# Altium PCB Antenna_array.PcbDoc
Units mm, origin at the board's own origin, x right, y up, seen from the top; angles counter-clockwise.
Board outline 115.53 x 58.55 mm, 2 copper layers (Top Layer, Bottom Layer), stack 0.533 mm thick; 26 components, 62 nets, 207 pads, 50 vias.
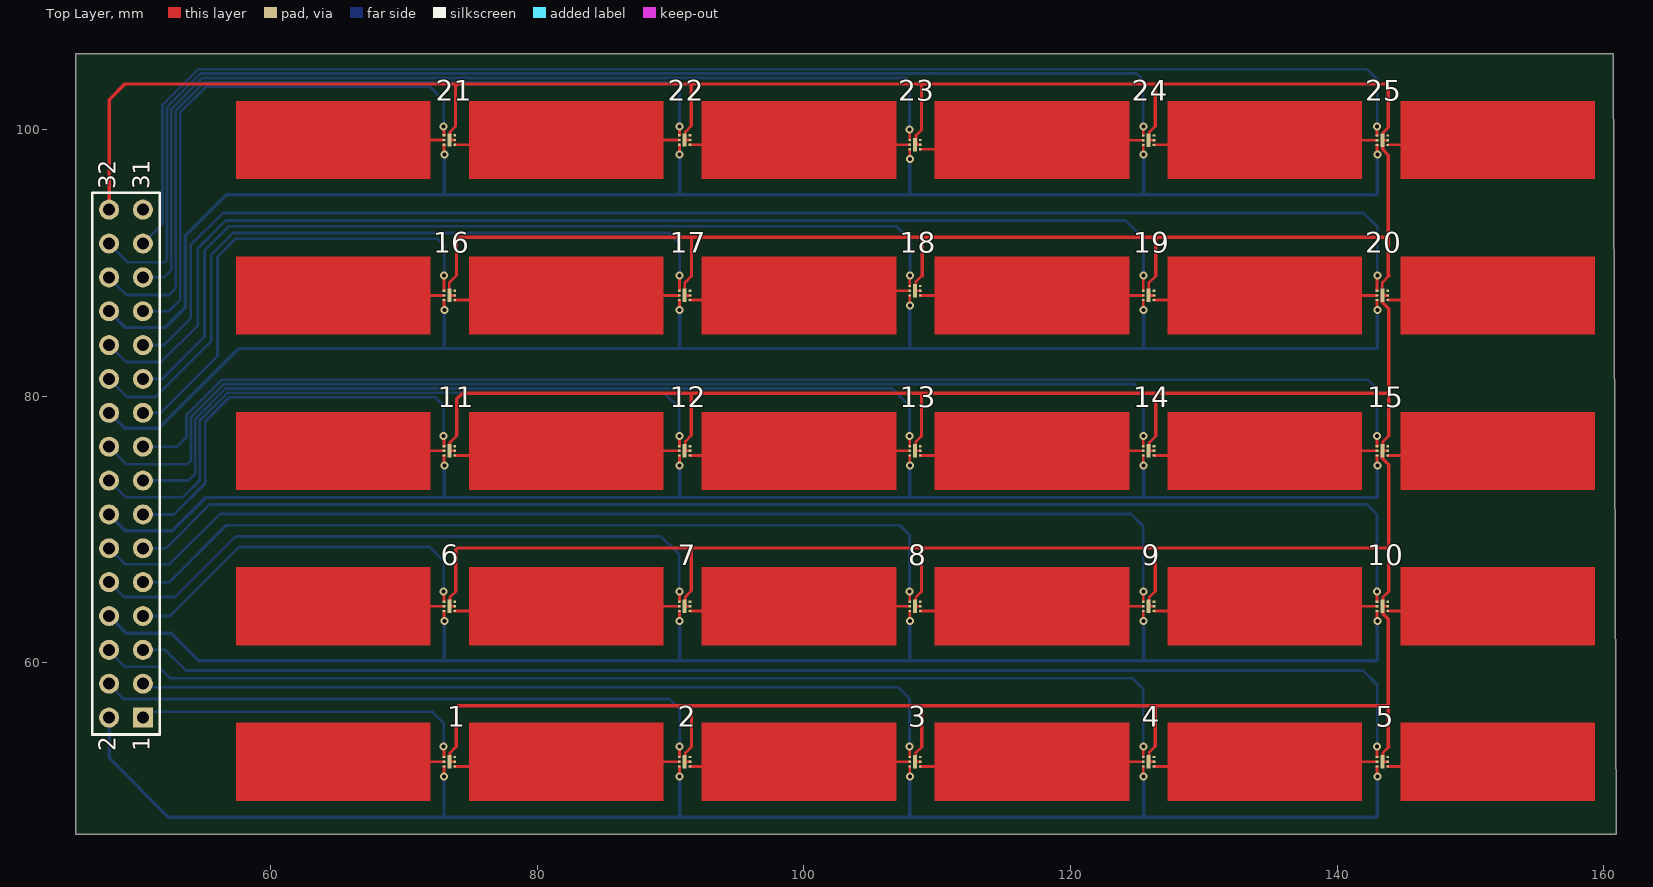
[diagram p0: Top Layer view]
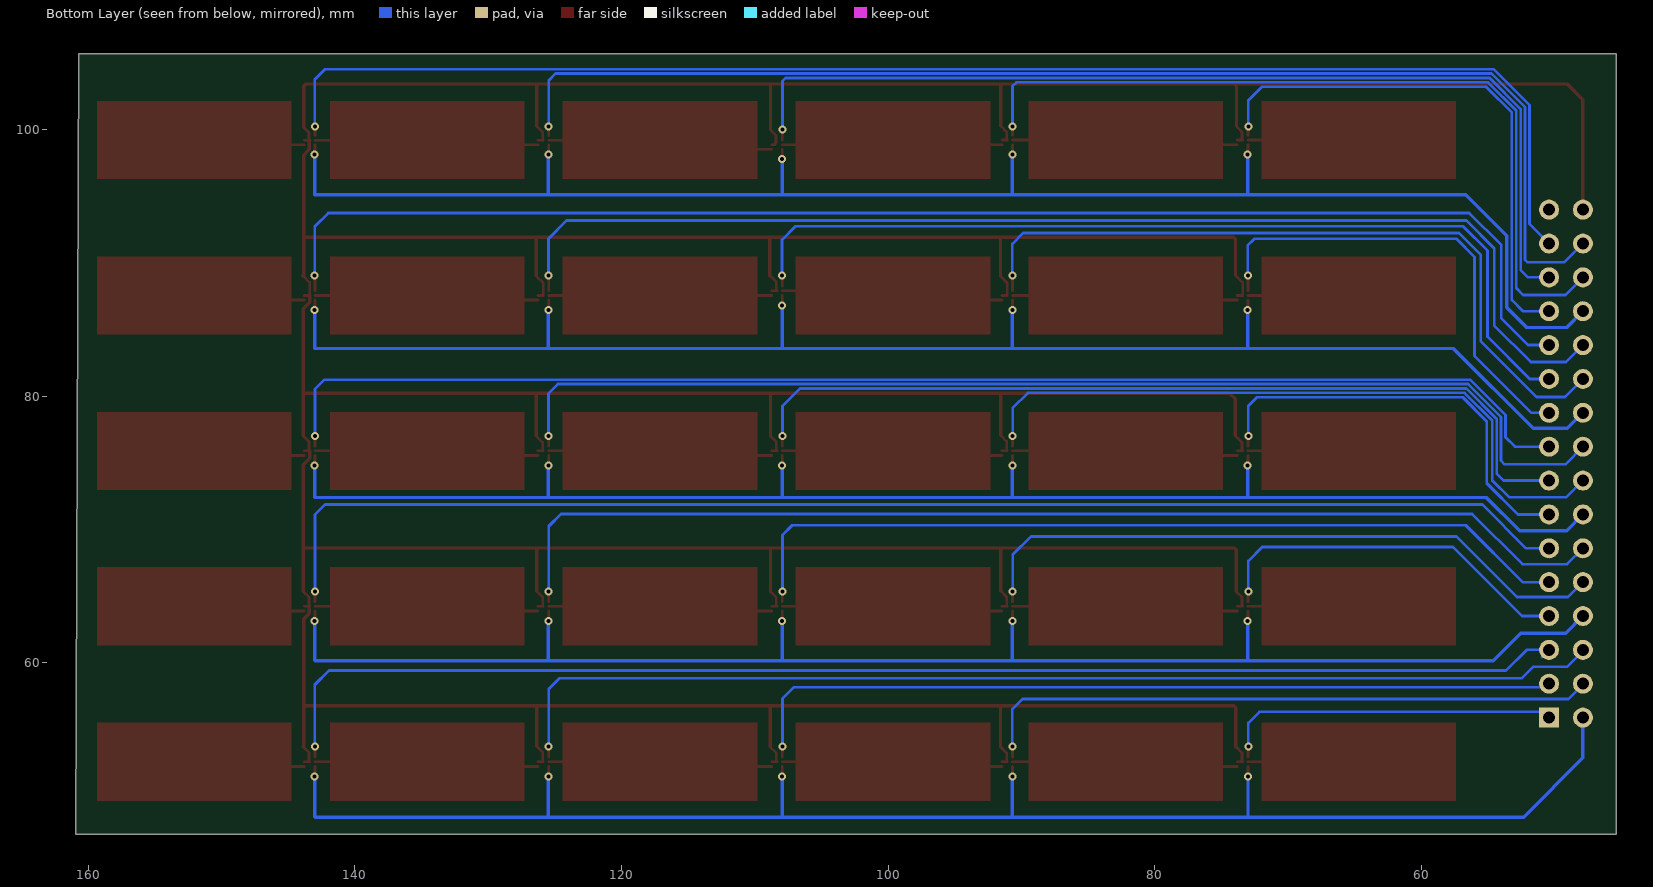
[diagram p1: Bottom Layer view, seen from below]

## Layer stack, top to bottom
Top Solder: solder mask 0.0102, Solder Resist, Dk 3.5
Top Layer: signal copper 0.0356
Dielectric 2: prepreg 0.0711, PP-006, Dk 4.1
Dielectric 1: dielectric 0.32, FR-4, Dk 4.8
Dielectric 3: prepreg 0.0711, PP-006, Dk 4.1
Bottom Layer: signal copper 0.0356
Bottom Solder: solder mask 0.0102, Solder Resist, Dk 3.5

## Board outline
45.39,47.117 160.919,47.117 160.701,105.664 45.39,105.664

## Design rules (kind name [scope] priority, off if disabled: settings)
Clearance [All] p1: gap=0.127 ignorepadtopadclearanceinfootprint=FALSE except(0: Arc-Hole Track-Hole SMDPad-Hole THPad-Hole Via-Hole Fill-Hole Poly-Hole Region-Hole Text-Hole)
PolygonConnect [All] p1: connectstyle=Relief reliefconductorwidth=0.254 reliefentries=4 polygonreliefangle="90 Angle" airgapwidth=0.254
RoutingVias [All] p1: holewidth=0.711 width=1.27 viastyle="Through Hole" minholewidth=0.711 minwidth=1.27 maxholewidth=0.711 maxwidth=1.27
SolderMaskExpansion [All] p1: expansion=0.102
Width [All] p1: maxlimit=0.508 minlimit=0.127 preferedwidth=0.203 minimp=50.000000 maximp=50.000000 favimp=50.000000
30 further rules are at their usual default settings.

## Components (designator, comment, footprint, x,y, rotation, side; value= is the part's Value field where it differs from the comment)
1 "Comment" PCBCOMPONENT_1 75.806,54.918 r180 top
2 "Comment" PCBCOMPONENT_1 93.459,54.918 r180 top
3 "Comment" PCBCOMPONENT_1 110.731,54.918 r180 top
4 "Comment" PCBCOMPONENT_1 128.257,54.918 r180 top
5 "Comment" PCBCOMPONENT_1 145.783,54.918 r180 top
6 "Comment" PCBCOMPONENT_1 75.806,66.578 r180 top
7 "Comment" PCBCOMPONENT_1 93.459,66.578 r180 top
8 "Comment" PCBCOMPONENT_1 110.731,66.578 r180 top
9 "Comment" PCBCOMPONENT_1 128.257,66.578 r180 top
10 "Comment" PCBCOMPONENT_1 145.783,66.578 r180 top
11 "Comment" PCBCOMPONENT_1 75.806,78.238 r180 top
12 "Comment" PCBCOMPONENT_1 93.459,78.238 r180 top
13 "Comment" PCBCOMPONENT_1 110.731,78.238 r180 top
14 "Comment" PCBCOMPONENT_1 128.257,78.238 r180 top
15 "Comment" PCBCOMPONENT_1 145.783,78.238 r180 top
16 "Comment" PCBCOMPONENT_1 75.806,89.898 r180 top
17 "Comment" PCBCOMPONENT_1 93.459,89.898 r180 top
18 "Comment" PCBCOMPONENT_1 110.731,90.248 r180 top
19 "Comment" PCBCOMPONENT_1 128.257,89.898 r180 top
20 "Comment" PCBCOMPONENT_1 145.783,89.898 r180 top
21 "Comment" PCBCOMPONENT_1 75.806,101.558 r180 top
22 "Comment" PCBCOMPONENT_1 93.459,101.558 r180 top
23 "Comment" PCBCOMPONENT_1 110.731,101.208 r180 top
24 "Comment" PCBCOMPONENT_1 128.257,101.537 r180 top
25 "Comment" PCBCOMPONENT_1 145.783,101.537 r180 top
? "Comment" HDR2X16 50.419,55.88 r90 top

## Footprints (in the part's own frame and the unit in brackets; to place one, negate y for a bottom-side part, rotate by r counter-clockwise, add the part's x,y. Pads: shape width x height; smd on the part's side, far side on the other; paste and mask are expansions set on the pad)
HDR2X16 [mm] "Connector; Header; 16x2 Position"
  rect 1.5x1.5 hole 0.9: 1(0,0)
  round 1.5 hole 0.9: 2(0,2.54) 3(2.54,0) 4(2.54,2.54) 5(5.08,0) 6(5.08,2.54) 7(7.62,0) 8(7.62,2.54) 9(10.16,0) 10(10.16,2.54) 11(12.7,0) 12(12.7,2.54) 13(15.24,0) 14(15.24,2.54) 15(17.78,0) 16(17.78,2.54) 17(20.32,0) 18(20.32,2.54) 19(22.86,0) 20(22.86,2.54) 21(25.4,0) 22(25.4,2.54) 23(27.94,0) 24(27.94,2.54) 25(30.48,0) 26(30.48,2.54) 27(33.02,0) 28(33.02,2.54) 29(35.56,0) 30(35.56,2.54) 31(38.1,0) 32(38.1,2.54)
  silkscreen extent -1.27,-1.27 39.37,3.81
PCBCOMPONENT_1 [mm]
  rect 0.2x0.17 smd: 1(2,2.7) 2(2,2.35) 3(2,2) 4(2.8,2) 5(2.8,2.35) 6(2.8,2.7)
  rect 0.3x1 smd: 7(2.4,2.35)
  body extent 1.79,1.75 3,2.95, height 0.25

## Via types
v1: diameter 0.6, hole 0.3, Top Layer to Bottom Layer, 50 vias

## Nets (pads, with @x,y where several pads share a name; then routed paths per layer and width w, separated by ;. In a path a pad name is that pad's centre, name@x,y a point inside that pad or via, vN(x,y) a via of type N, cw(c..) or ccw(c..) an arc to the next point about the centre after c; other vN are vias at no path point)
Ant1: 1.5 | length 1
  Top Layer w0.203: 71.981,52.568 1.5
Ant2: 1.1 2.5 | length 2.5
  Top Layer w0.203: 1.1 74.93,52.218 ; 89.281,52.568 2.5
Ant3: 2.1 3.5 | length 2.4
  Top Layer w0.203: 2.1 92.562,52.218 92.583,52.197 ; 106.68,52.578 106.69,52.568 3.5
Ant4: 3.1 4.5 | length 2.8
  Top Layer w0.203: 3.1 109.961,52.218 109.982,52.197 ; 123.952,52.568 4.5
Ant5: 4.1 5.5 | length 2.8
  Top Layer w0.203: 4.1 127.635,52.218 ; 141.605,52.578 141.615,52.568 5.5
Ant6: 5.1 | length 1.3
  Top Layer w0.203: 5.1 145.034,52.218
Ant7: 6.5 | length 1.8
  Top Layer w0.203: 71.247,64.262 71.281,64.228 6.5
Ant8: 6.1 7.5 | length 3.1
  Top Layer w0.203: 6.1 75.311,63.878 ; 89.027,64.228 7.5
Ant9: 7.1 8.5 | length 2.5
  Top Layer w0.203: 7.1 92.71,63.878 ; 106.68,64.228 8.5
Ant10: 8.1 9.5 | length 2.8
  Top Layer w0.203: 8.1 110.109,63.878 ; 124.079,64.262 124.113,64.228 9.5
Ant11: 9.1 10.5 | length 2.8
  Top Layer w0.203: 9.1 127.505,63.878 127.508,63.881 ; 141.478,64.228 10.5
Ant12: 10.1 | length 1.5
  Top Layer w0.203: 10.1 145.288,63.878
Ant13: 11.5 | length 1.7
  Top Layer w0.203: 71.374,75.819 71.443,75.888 11.5
Ant14: 11.1 12.5 | length 3
  Top Layer w0.203: 11.1 75.184,75.538 ; 89.027,75.888 12.5
Ant15: 12.1 13.5 | length 2.5
  Top Layer w0.203: 12.1 92.683,75.538 92.71,75.565 ; 106.68,75.888 13.5
Ant16: 13.1 14.5 | length 3
  Top Layer w0.203: 13.1 110.109,75.538 ; 123.825,75.888 14.5
Ant17: 14.1 15.5 | length 3
  Top Layer w0.203: 14.1 127.862,75.538 127.889,75.565 ; 141.605,75.888 15.5
Ant18: 15.1 | length 1.5
  Top Layer w0.203: 15.1 145.188,75.538 145.288,75.438
Ant19: 16.5 | length 1.8
  Top Layer w0.203: 71.247,87.63 71.329,87.548 16.5
Ant20: 16.1 17.5 | length 3.3
  Top Layer w0.203: 16.1 75.565,87.198 ; 89.154,87.548 17.5
Ant21: 17.1 18.5 | length 3
  Top Layer w0.203: 17.1 92.913,87.198 92.964,87.249 ; 106.426,87.898 18.5
Ant22: 18.1 19.5 | length 3.4
  Top Layer w0.203: 18.1 110.49,87.548 ; 123.825,87.548 19.5
Ant23: 19.1 20.5 | length 3.1
  Top Layer w0.203: 19.1 127.508,87.198 ; 141.097,87.548 20.5
Ant24: 20.1 | length 1.8
  Top Layer w0.203: 20.1 145.542,87.198
Ant25: 21.5 | length 1.7
  Top Layer w0.203: 71.33,99.208 21.5
Ant26: 21.1 22.5 | length 3.2
  Top Layer w0.203: 21.1 75.386,98.858 75.438,98.806 ; 89.154,99.208 22.5
Ant27: 22.1 23.5 | length 2.8
  Top Layer w0.203: 22.1 92.71,98.858 ; 106.426,98.837 106.447,98.858 23.5
Ant28: 23.1 24.5 | length 3.2
  Top Layer w0.203: 23.1 110.28,98.508 110.363,98.425 ; 123.952,99.187 24.5
Ant29: 24.1 25.5 | length 3
  Top Layer w0.203: 24.1 127.841,98.837 127.862,98.858 ; 141.605,99.187 25.5
Ant30: 25.1 | length 1.3
  Top Layer w0.203: 25.1 145.034,98.837
GND: 1.2 1.7 2.2 2.7 3.2 3.7 4.2 4.7 5.2 5.7 6.2 6.7 7.2 7.7 8.2 8.7 9.2 9.7 10.2 10.7 11.2 11.7 12.2 12.7 13.2 13.7 14.2 14.7 15.2 15.7 16.2 16.7 17.2 17.7 18.2 18.7 19.2 19.7 20.2 20.7 21.2 21.7 22.2 22.7 23.2 23.7 24.2 24.7 25.2 25.7 ?.32 | length 536.4
  Top Layer w0.203: 1.2 1.7 73.454,52.616 73.454,53.236 73.914,53.696 ; 6.2 6.7 73.454,64.276 73.454,64.92 73.889,65.354 ; 11.2 11.7 73.454,75.936 73.454,76.528 73.965,77.038 ; 16.2 16.7 73.406,88.519 73.939,89.052 ; 21.2 21.7 73.454,99.256 73.454,99.807 73.863,100.216 73.863,100.254 ; 2.2 2.7 91.107,52.616 91.107,53.236 91.567,53.696 ; 7.2 7.7 91.107,64.276 91.107,64.945 91.542,65.38 ; 12.2 12.7 91.107,75.936 91.107,76.604 91.542,77.038 ; 17.2 17.7 91.059,88.487 91.567,88.995 ; 22.2 22.7 91.107,99.256 91.107,99.82 91.542,100.254 ; 23.7@108.465,98.858 23.2 ; 23.7@108.465,98.965 108.402,99.028 108.402,99.556 108.814,99.967 108.814,100 ; 3.2 3.7 108.379,52.616 108.379,53.23 108.839,53.689 ; 8.2 8.7 108.379,64.276 108.379,64.895 108.814,65.329 ; 13.2 13.7 108.379,75.936 108.379,76.553 108.814,76.987 ; 18.2 18.7 108.379,87.946 108.379,88.542 108.864,89.027 ; 4.2 4.7 125.905,52.616 125.905,53.287 126.34,53.721 ; 9.2 9.7 125.905,64.276 125.905,64.92 126.34,65.354 ; 14.2 14.7 125.905,75.936 125.905,76.528 126.39,77.013 ; 19.2 19.7 125.857,88.475 126.39,89.008 ; 24.2 24.7 125.905,99.235 125.905,99.794 126.34,100.228 ; 10.7@143.431,64.179 10.7 ; 5.2 5.7 143.431,52.616 143.431,53.255 143.866,53.689 ; 10.2 10.7 ; 15.2 15.7 143.431,75.936 143.431,76.579 143.866,77.013 ; 20.2 20.7 143.383,88.519 143.891,89.027 ; 25.2 25.7 143.431,99.235 143.431,99.75 143.84,100.159 143.84,100.197 ; 143.866,65.348 143.431,64.914 143.431,64.276 10.7
  Top Layer w0.254: ?.32 47.879,102.235 49.047,103.403 74.012,103.403 ; 73.863,100.254 73.863,103.255 74.012,103.403 ; 73.889,65.354 73.889,68.457 74.037,68.605 91.567,68.605 ; 73.914,53.696 73.914,56.617 74.066,56.769 108.814,56.769 ; 73.939,89.052 73.939,91.774 74.088,91.923 91.542,91.923 ; 73.965,77.038 73.965,79.781 74.397,80.213 91.465,80.213 ; 91.542,65.38 91.542,68.58 91.567,68.605 ; 91.542,77.038 91.542,80.137 91.465,80.213 ; 91.542,100.254 91.542,103.327 91.465,103.403 ; 91.567,53.696 91.567,56.642 ; 91.567,88.995 91.567,91.897 91.542,91.923 ; 108.814,65.329 108.814,68.529 108.89,68.605 ; 108.814,76.987 108.814,80.137 108.737,80.213 ; 108.814,100 108.814,103.403 ; 108.839,53.689 108.839,56.744 108.814,56.769 ; 108.864,89.027 108.864,91.923 ; 126.34,53.721 126.34,56.718 126.289,56.769 ; 126.34,65.354 126.34,68.58 126.314,68.605 ; 126.34,100.228 126.34,103.302 126.238,103.403 ; 126.39,77.013 126.39,80.188 126.416,80.213 ; 126.39,89.008 126.39,91.897 126.365,91.923 ; 15.7 143.383,75.336 143.866,74.854 143.866,68.605 ; 20.7 143.383,87.02 143.866,86.538 143.866,80.213 ; 25.7 143.406,99.164 143.406,98.5 143.84,98.065 143.84,91.923 ; 10.7@143.431,64.179 143.431,64.07 143.429,64.068 143.429,64.026 143.427,64.025 143.427,63.73 143.429,63.729 143.429,63.687 143.84,63.276 143.84,56.769 ; 143.84,100.197 143.84,103.255 143.691,103.403 126.238,103.403 ; 143.866,53.689 143.84,53.715 143.84,56.769 ; 143.866,65.348 143.866,68.605 ; 143.866,77.013 143.866,80.213 ; 143.891,89.027 143.84,89.078 143.84,91.825 143.742,91.923 126.365,91.923 ; 74.012,103.403 91.465,103.403 ; 91.465,80.213 108.737,80.213 ; 91.465,103.403 108.814,103.403 ; 91.542,91.923 108.864,91.923 ; 91.567,68.605 108.89,68.605 ; 108.737,80.213 126.416,80.213 ; 108.814,56.769 126.289,56.769 ; 108.814,103.403 126.238,103.403 ; 108.864,91.923 126.365,91.923 ; 108.89,68.605 126.314,68.605 ; 126.289,56.769 143.84,56.769 ; 126.314,68.605 143.866,68.605 ; 126.416,80.213 143.866,80.213
GPIO0: 1.4 ?.1 | length 25.7
  Top Layer w0.203: v1(72.974,53.696) 73.006,53.664 1.4
  Bottom Layer w0.203: ?.1 50.851,56.312 72.136,56.312 72.974,55.474 v1(72.974,53.696) v1@73,53.721
GPIO1: 1.6 2.6 3.6 4.6 5.6 ?.2 | length 119.1
  Top Layer w0.203: v1(73,51.46) 73.006,51.467 1.6 ; 2.6 90.659,51.479 v1(90.678,51.46) ; 3.6 107.931,51.479 v1(107.95,51.46) ; 4.6 125.457,51.479 v1(125.476,51.46) ; 5.6 142.983,51.479 v1(143.002,51.46)
  Bottom Layer w0.254: ?.2 47.879,52.857 52.324,48.412 73.025,48.412 ; v1(73,51.46) 73,48.438 73.025,48.412 ; v1(90.678,51.46) 90.678,48.463 90.627,48.412 ; v1(107.95,51.46) 107.95,48.412 ; v1(125.476,51.46) 125.476,48.412 ; v1(143.002,51.46) 143.002,48.438 142.977,48.412 125.476,48.412 ; 73.025,48.412 90.627,48.412 ; 90.627,48.412 107.95,48.412 ; 107.95,48.412 125.476,48.412
GPIO2: 3.4 ?.3 | length 62.3
  Top Layer w0.203: 3.4 v1@107.931,53.689
  Bottom Layer w0.203: ?.3 50.673,58.166 107.061,58.166 107.925,57.302 v1(107.925,53.696)
GPIO3: 2.4 ?.4 | length 47.2
  Top Layer w0.203: 2.4 v1@90.659,53.689
  Bottom Layer w0.203: ?.4 47.879,58.369 48.971,57.277 89.916,57.277 90.678,56.515 90.678,53.721 v1(90.653,53.696)
GPIO4: 5.4 ?.5 | length 99.9
  Top Layer w0.203: 5.4 v1@142.983,53.689
  Bottom Layer w0.203: 50.952,60.427 ?.5 52.095,60.96 53.645,59.411 141.935,59.411 143.002,58.344 143.002,53.721 v1(142.977,53.696)
GPIO5: 4.4 ?.6 | length 83.9
  Top Layer w0.203: 4.4 v1@125.457,53.689
  Bottom Layer w0.203: ?.6 47.879,60.884 49.073,59.69 51.613,59.69 52.476,58.826 124.663,58.826 125.451,58.039 v1(125.451,53.696)
GPIO6: 6.4 ?.7 | length 28.2
  Top Layer w0.203: v1(72.974,65.354) 73.006,65.322 6.4
  Bottom Layer w0.203: ?.7 52.451,63.5 57.633,68.682 71.933,68.682 72.974,67.64 v1(72.974,65.354)
GPIO7: 6.6 7.6 8.6 9.6 10.6 ?.8 | length 115.2
  Top Layer w0.203: 6.6 73.006,63.138 v1(73.025,63.119) ; 7.6 90.659,63.138 v1(90.678,63.119) ; 8.6 107.931,63.138 v1(107.95,63.119) ; 9.6 125.457,63.138 v1(125.476,63.119) ; 10.6 142.983,63.138 v1(143.002,63.119)
  Bottom Layer w0.254: ?.8 49.174,62.205 52.553,62.205 54.61,60.147 73,60.147 ; v1(73.025,63.119) 73.025,60.173 73,60.147 ; v1(90.678,63.119) 90.678,60.173 90.653,60.147 ; v1(107.95,63.119) 107.95,60.198 107.899,60.147 ; v1(125.476,63.119) 125.476,60.173 125.451,60.147 ; v1(143.002,63.119) 143.002,60.173 142.977,60.147 125.451,60.147 ; 73,60.147 90.653,60.147 ; 90.653,60.147 107.899,60.147 ; 107.899,60.147 125.451,60.147
GPIO8: 8.4 ?.9 | length 64.6
  Top Layer w0.203: v1(107.925,65.354) 107.931,65.348 8.4
  Bottom Layer w0.203: ?.9 52.4,66.04 56.667,70.307 107.188,70.307 107.925,69.571 v1(107.925,65.354)
GPIO9: 7.4 ?.10 | length 49.2
  Top Layer w0.203: v1(90.653,65.354) 90.659,65.348 7.4
  Bottom Layer w0.203: ?.10 48.997,64.922 52.832,64.922 57.379,69.469 89.281,69.469 90.653,68.097 v1(90.653,65.354)
GPIO10: 10.4 ?.11 | length 100.8
  Top Layer w0.203: v1(142.977,65.354) 142.983,65.348 10.4
  Bottom Layer w0.203: ?.11 52.146,68.58 55.423,71.857 142.24,71.857 142.977,71.12 v1(142.977,65.354)
GPIO11: 9.4 ?.12 | length 85.7
  Top Layer w0.203: v1(125.451,65.354) 125.457,65.348 9.4
  Bottom Layer w0.203: ?.12 49.073,67.386 52.426,67.386 56.185,71.145 124.536,71.145 125.451,70.231 v1(125.451,65.354)
GPIO12: 11.4 ?.13 | length 32.2
  Top Layer w0.203: v1(72.974,77.013) 73.006,76.981 11.4
  Bottom Layer w0.203: ?.13 52.756,71.12 55.093,73.457 55.093,78.105 56.896,79.908 72.339,79.908 72.974,79.273 v1(72.974,77.013)
GPIO13: 11.6 12.6 13.6 14.6 15.6 ?.14 | length 112.5
  Top Layer w0.203: 11.6 73.006,74.822 v1(73.025,74.803) ; 12.6 90.659,74.822 v1(90.678,74.803) ; 13.6 107.931,74.822 v1(107.95,74.803) ; 14.6 125.457,74.822 v1(125.476,74.803) ; 15.6 142.983,74.822 v1(143.002,74.803)
  Bottom Layer w0.254: ?.14 49.098,69.901 52.629,69.901 55.118,72.39 73.025,72.39 ; v1(73.025,74.803) 73.025,72.39 ; v1(90.678,74.803) 90.678,72.39 ; v1(107.95,74.803) 107.95,72.415 107.925,72.39 ; v1(125.476,74.803) 125.476,72.441 125.425,72.39 ; v1(143.002,74.803) 143.002,72.39 125.425,72.39 ; 73.025,72.39 90.678,72.39 ; 90.678,72.39 107.925,72.39 ; 107.925,72.39 125.425,72.39
GPIO14: 13.4 ?.15 | length 66.3
  Top Layer w0.203: v1(107.925,77.013) 107.931,77.006 13.4
  Bottom Layer w0.203: ?.15 53.823,73.66 54.351,74.189 54.351,78.297 56.622,80.569 106.604,80.569 107.925,79.248 v1(107.925,77.013)
GPIO15: 12.4 ?.16 | length 52.5
  Top Layer w0.203: v1(90.653,77.013) 90.659,77.006 12.4
  Bottom Layer w0.203: ?.16 49.124,72.415 53.416,72.415 54.681,73.681 54.681,78.161 56.759,80.239 89.51,80.239 90.653,79.096 v1(90.653,77.013)
GPIO16: 15.4 ?.17 | length 100.2
  Top Layer w0.203: v1(142.977,77.013) 142.983,77.006 15.4
  Bottom Layer w0.203: ?.17 52.984,76.2 53.691,76.906 53.691,78.571 56.349,81.229 142.265,81.229 142.977,80.518 v1(142.977,77.013)
GPIO17: 14.4 ?.18 | length 86.8
  Top Layer w0.203: v1(125.451,77.013) 125.457,77.006 14.4
  Bottom Layer w0.203: ?.18 49.2,74.879 53.746,74.879 54.021,75.154 54.021,78.434 56.486,80.899 124.765,80.899 125.476,80.188 125.476,77.038 v1(125.451,77.013)
GPIO18: 16.4 ?.19 | length 36
  Top Layer w0.203: v1(73,89.027) 73.006,89.021 16.4
  Bottom Layer w0.203: ?.19 51.74,78.74 56.007,83.007 56.007,90.424 57.379,91.796 72.517,91.796 73.025,91.288 73.025,89.052 v1(73,89.027)
GPIO19: 16.6 17.6 18.6 19.6 20.6 ?.20 | length 116.7
  Top Layer w0.203: 16.6 73.006,86.481 v1(73.025,86.462) ; 17.6 90.659,86.481 v1(90.678,86.462) ; 18.6 107.931,86.811 v1(107.95,86.792) ; 19.6 125.457,86.481 v1(125.476,86.462) ; 20.6 142.983,86.481 v1(143.002,86.462)
  Bottom Layer w0.254: ?.20 49.047,77.572 51.613,77.572 57.607,83.566 73.025,83.566 ; v1(73.025,86.462) 73.025,83.566 ; v1(90.678,86.462) 90.678,83.591 90.703,83.566 ; v1(107.95,86.792) 107.95,83.591 107.975,83.566 ; v1(125.476,86.462) 125.476,83.591 125.501,83.566 ; v1(143.002,86.462) 143.002,83.566 125.501,83.566 ; 73.025,83.566 90.703,83.566 ; 90.703,83.566 107.975,83.566 ; 107.975,83.566 125.501,83.566
GPIO20: 18.4 ?.21 | length 70
  Top Layer w0.203: 18.4 107.931,89.008 v1(107.95,89.027)
  Bottom Layer w0.203: ?.21 51.867,81.28 55.042,84.455 55.042,90.907 56.871,92.735 106.934,92.735 107.95,91.719 v1(107.95,89.027)
GPIO21: 17.4 ?.22 | length 56.1
  Top Layer w0.203: 17.4 90.659,89.008 v1(90.678,89.027)
  Bottom Layer w0.203: ?.22 49.225,79.934 51.359,79.934 55.55,84.125 55.55,90.602 57.175,92.227 89.865,92.227 90.678,91.415 v1(90.678,89.027)
GPIO22: 20.4 ?.23 | length 105.1
  Top Layer w0.203: 20.4 142.983,89.008 v1(143.002,89.027)
  Bottom Layer w0.203: ?.23 51.994,83.82 54,85.827 54,91.313 56.413,93.726 141.986,93.726 143.002,92.71 v1(143.002,89.027)
GPIO23: 19.4 ?.24 | length 90.4
  Top Layer w0.203: 19.4 125.457,89.008 v1(125.476,89.027)
  Bottom Layer w0.203: ?.24 49.149,82.55 51.791,82.55 54.534,85.293 54.534,91.084 56.617,93.167 124.104,93.167 125.476,91.796 v1(125.476,89.027)
GPIO24: 21.4 ?.25 | length 40.8
  Top Layer w0.203: v1(72.974,100.228) 73.006,100.197 21.4
  Bottom Layer w0.203: ?.25 52.375,86.36 53.213,87.198 53.213,101.27 55.143,103.2 71.958,103.2 72.974,102.184 v1(72.974,100.228)
GPIO25: 21.6 22.6 23.6 24.6 25.6 ?.26 | length 121.4
  Top Layer w0.203: 21.6 73.006,98.139 v1(73.025,98.12) ; 22.6 90.659,98.139 v1(90.678,98.12) ; 23.6 107.931,97.784 v1(107.95,97.765) ; 24.6 125.457,98.139 v1(125.476,98.12) ; 25.6 142.983,98.139 v1(143.002,98.12)
  Bottom Layer w0.254: ?.26 49.098,85.141 52.095,85.141 53.594,86.639 53.594,92.024 56.667,95.098 73.076,95.098 ; v1(73.025,98.12) 73.025,95.148 73.076,95.098 ; v1(90.678,98.12) 90.678,95.148 90.627,95.098 ; v1(107.95,97.765) 107.95,95.098 ; v1(125.476,98.12) 125.476,95.148 125.425,95.098 ; v1(143.002,98.12) 143.002,95.098 125.425,95.098 ; 73.076,95.098 90.627,95.098 ; 90.627,95.098 107.95,95.098 ; 107.95,95.098 125.425,95.098
GPIO26: 23.4 ?.27 | length 75.3
  Top Layer w0.203: v1(107.925,99.974) 107.931,99.968 23.4
  Bottom Layer w0.203: ?.27 51.994,88.9 52.553,89.459 52.553,101.543 54.87,103.861 107.696,103.861 107.925,103.632 v1(107.925,99.974)
GPIO27: 22.4 ?.28 | length 61.5
  Top Layer w0.203: 22.4 v1(90.659,100.228)
  Bottom Layer w0.203: ?.28 49.2,87.579 52.375,87.579 52.883,88.087 52.883,101.407 55.007,103.53 90.373,103.53 90.659,103.245 v1(90.659,100.228)
GPIO28: 25.4 ?.29 | length 107.8
  Top Layer w0.203: v1(142.977,100.228) 142.983,100.222 25.4
  Bottom Layer w0.203: ?.29 51.892,92.913 51.892,101.817 54.596,104.521 142.215,104.521 143.002,103.734 143.002,100.254 v1(142.977,100.228)
GPIO29: 24.4 ?.30 | length 95.1
  Top Layer w0.203: v1(125.451,100.228) 125.457,100.222 24.4
  Bottom Layer w0.203: ?.30 49.276,90.043 52.053,90.043 52.222,90.213 52.222,101.68 54.733,104.191 124.943,104.191 125.451,103.683 v1(125.451,100.228)
GPIO30: ?.31
pads on no net: 1.3 2.3 3.3 4.3 5.3 6.3 7.3 8.3 9.3 10.3 11.3 12.3 13.3 14.3 15.3 16.3 17.3 18.3 19.3 20.3 21.3 22.3 23.3 24.3 25.3

## Other copper
Top Layer:
  region net Ant25: 71.981,96.295 57.418,96.295 57.418,102.12 71.981,102.12
  region net Ant27: 106.915,96.295 92.352,96.295 92.352,102.12 106.915,102.12
  region net Ant28: 124.382,96.295 109.819,96.295 109.819,102.12 124.382,102.12
  region net Ant30: 159.316,96.295 144.753,96.295 144.753,102.12 159.316,102.12
  region net Ant24: 159.316,84.635 144.753,84.635 144.753,90.46 159.316,90.46
  region net Ant22: 124.382,84.635 109.819,84.635 109.819,90.46 124.382,90.46
  region net Ant21: 106.915,84.635 92.352,84.635 92.352,90.46 106.915,90.46
  region net Ant19: 71.981,84.635 57.418,84.635 57.418,90.46 71.981,90.46
  region net Ant18: 159.316,72.975 144.753,72.975 144.753,78.8 159.316,78.8
  region net Ant16: 124.382,72.975 109.819,72.975 109.819,78.8 124.382,78.8
  region net Ant15: 106.915,72.975 92.352,72.975 92.352,78.8 106.915,78.8
  region net Ant13: 71.981,72.975 57.418,72.975 57.418,78.8 71.981,78.8
  region net Ant12: 159.316,61.315 144.753,61.315 144.753,67.14 159.316,67.14
  region net Ant10: 124.382,61.315 109.819,61.315 109.819,67.14 124.382,67.14
  region net Ant9: 106.915,61.315 92.352,61.315 92.352,67.14 106.915,67.14
  region net Ant7: 71.981,61.315 57.418,61.315 57.418,67.14 71.981,67.14
  region net Ant6: 159.316,49.655 144.753,49.655 144.753,55.48 159.316,55.48
  region net Ant4: 124.382,49.655 109.819,49.655 109.819,55.48 124.382,55.48
  region net Ant3: 106.915,49.655 92.352,49.655 92.352,55.48 106.915,55.48
  region net Ant1: 71.981,49.655 57.418,49.655 57.418,55.48 71.981,55.48
  region net Ant2: 89.448,49.655 74.885,49.655 74.885,55.48 89.448,55.48
  region net Ant8: 89.448,61.315 74.885,61.315 74.885,67.14 89.448,67.14
  region net Ant14: 89.448,72.975 74.885,72.975 74.885,78.8 89.448,78.8
  region net Ant20: 89.448,84.635 74.885,84.635 74.885,90.46 89.448,90.46
  region net Ant26: 89.448,96.295 74.885,96.295 74.885,102.12 89.448,102.12
  region net Ant5: 141.849,49.655 127.286,49.655 127.286,55.48 141.849,55.48
  region net Ant11: 141.849,61.315 127.286,61.315 127.286,67.14 141.849,67.14
  region net Ant17: 141.849,72.975 127.286,72.975 127.286,78.8 141.849,78.8
  region net Ant23: 141.849,84.635 127.286,84.635 127.286,90.46 141.849,90.46
  region net Ant29: 141.849,96.295 127.286,96.295 127.286,102.12 141.849,102.12

## Silkscreen, mask and mechanical layers (free items; w line width, h text height)
Top Overlay:
Mechanical 1:
  the board outline again, w0.254

## Text inside footprints (layer, text, board x,y; h text height)
?: Top Overlay "2" at 48.387,53.34 h1.27 r90; Top Overlay "1" at 50.927,53.34 h1.27 r90; Top Overlay "31" at 50.927,95.504 h1.27 r90; Top Overlay "32" at 48.387,95.504 h1.27 r90